# Altium PCB 11-LED.PcbDoc
Units mm, origin at the board's own origin, x right, y up, seen from the top; angles counter-clockwise.
Board outline 40 x 40 mm, 4 copper layers (Top Layer, Internal Plane 1, Internal Plane 2, Bottom Layer), stack 0.462 mm thick; 26 components, 21 nets, 68 pads, 16 vias.
Unrouted connection lines stored in the file: 38.
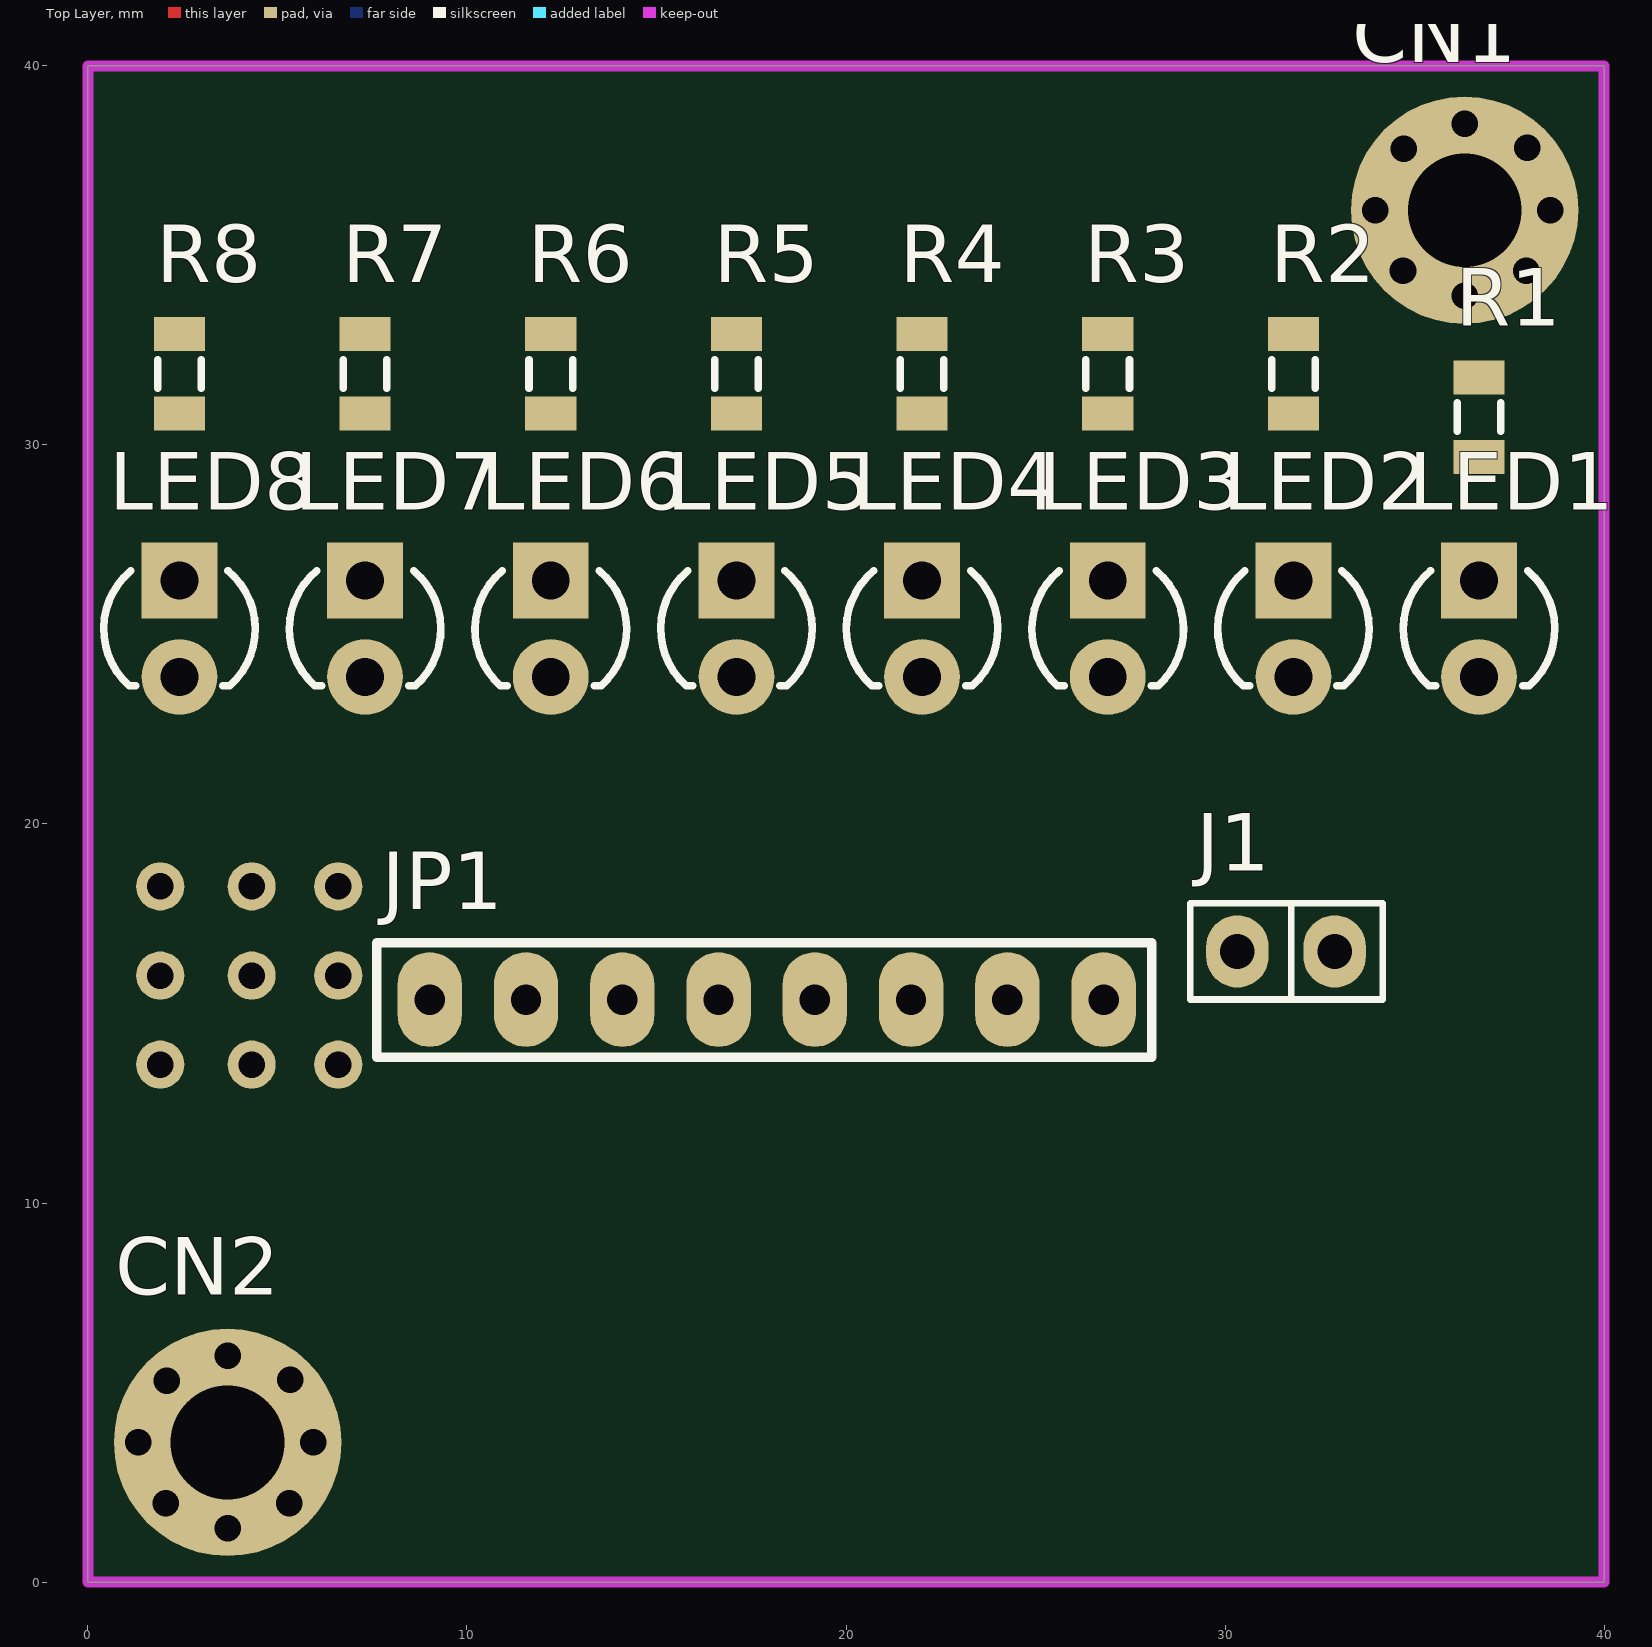
[diagram p0: Top Layer view]
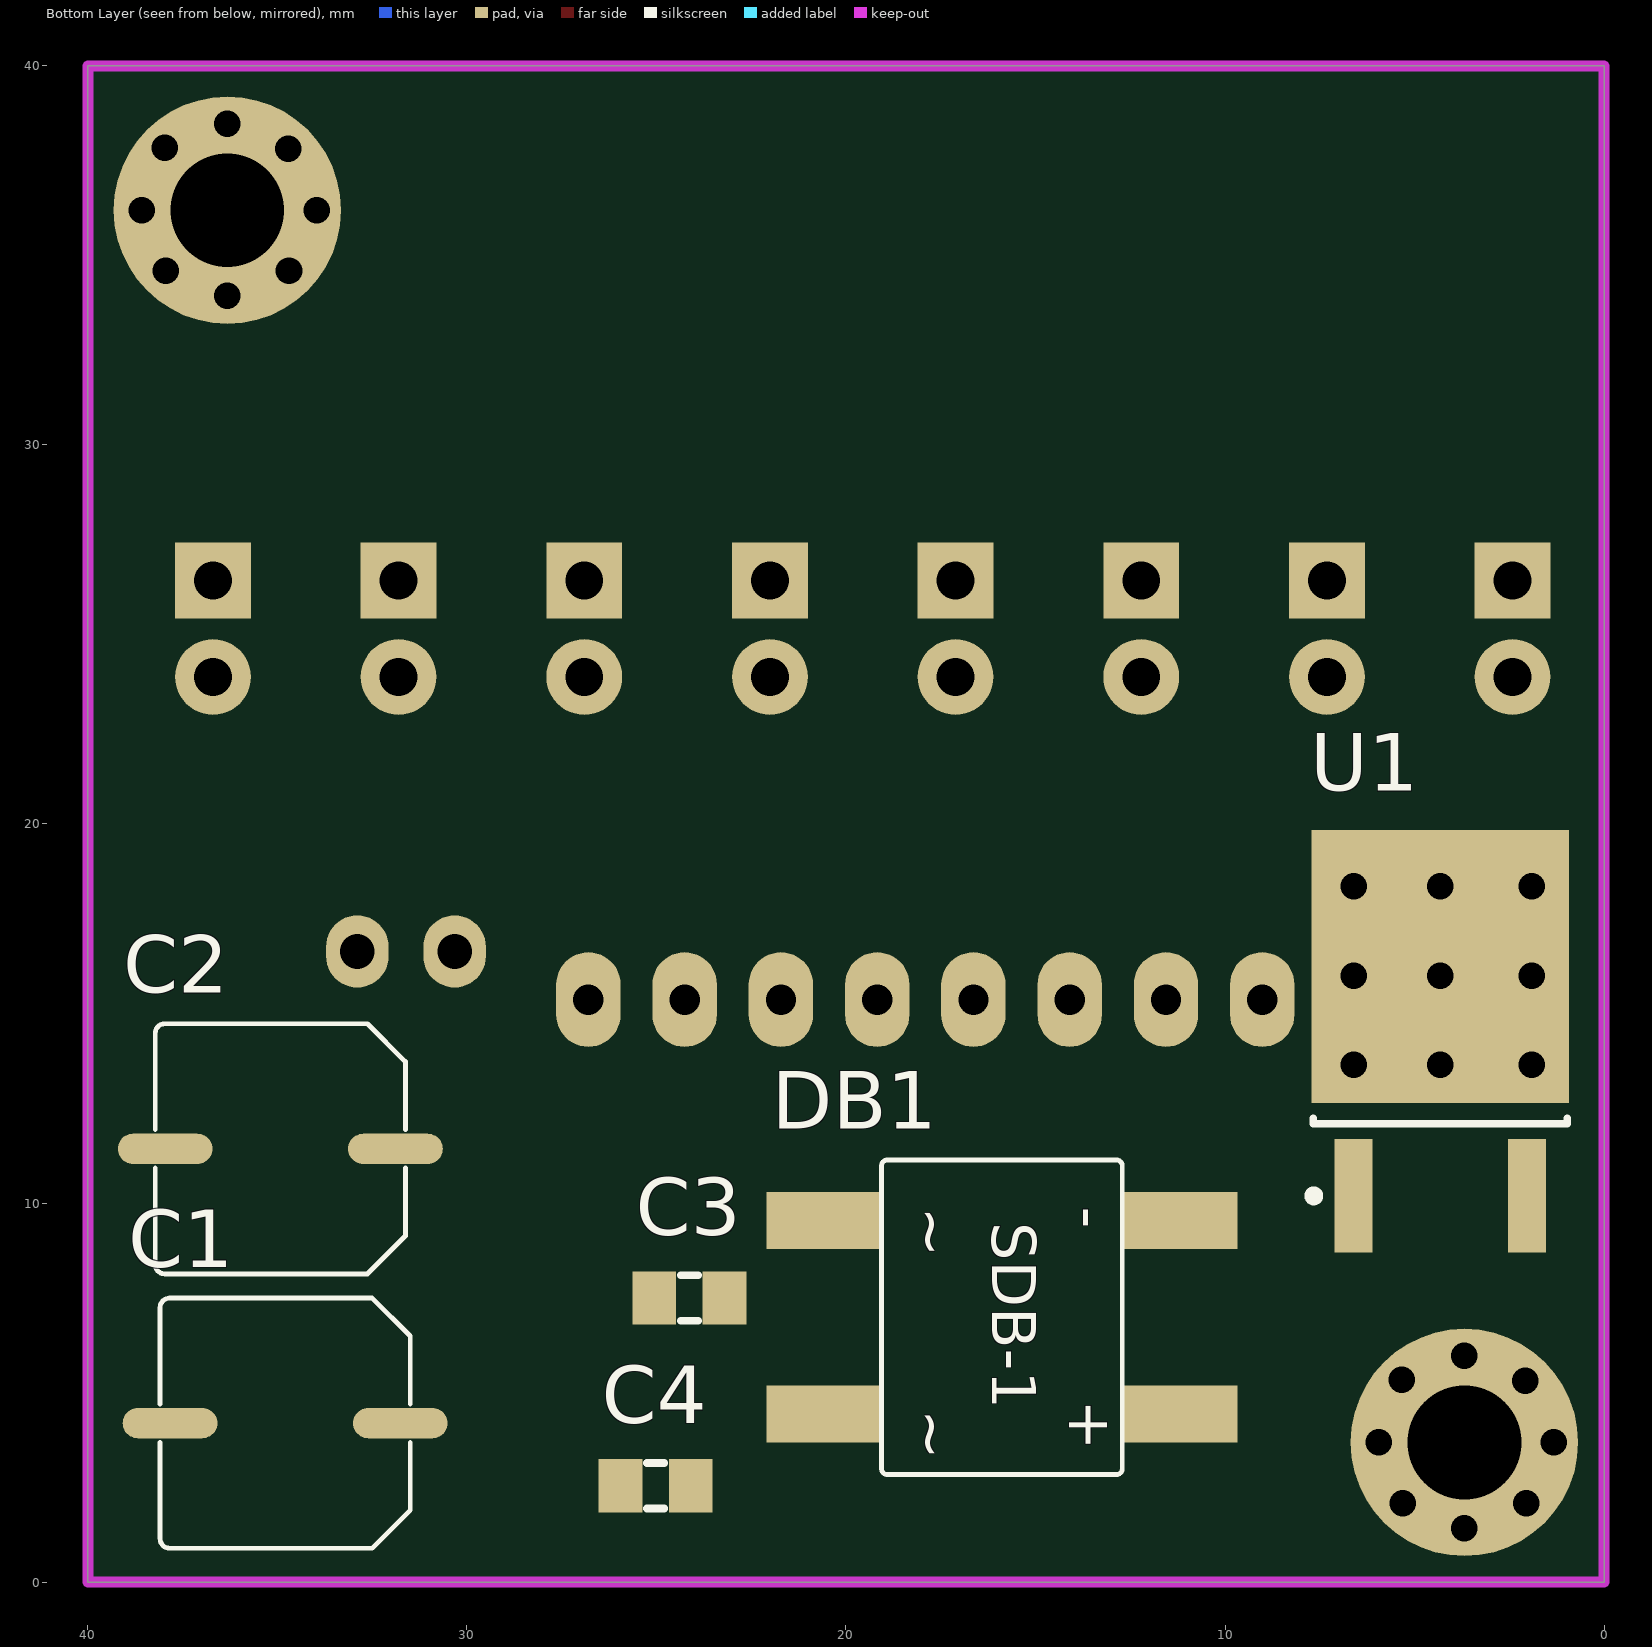
[diagram p1: Bottom Layer view, seen from below]
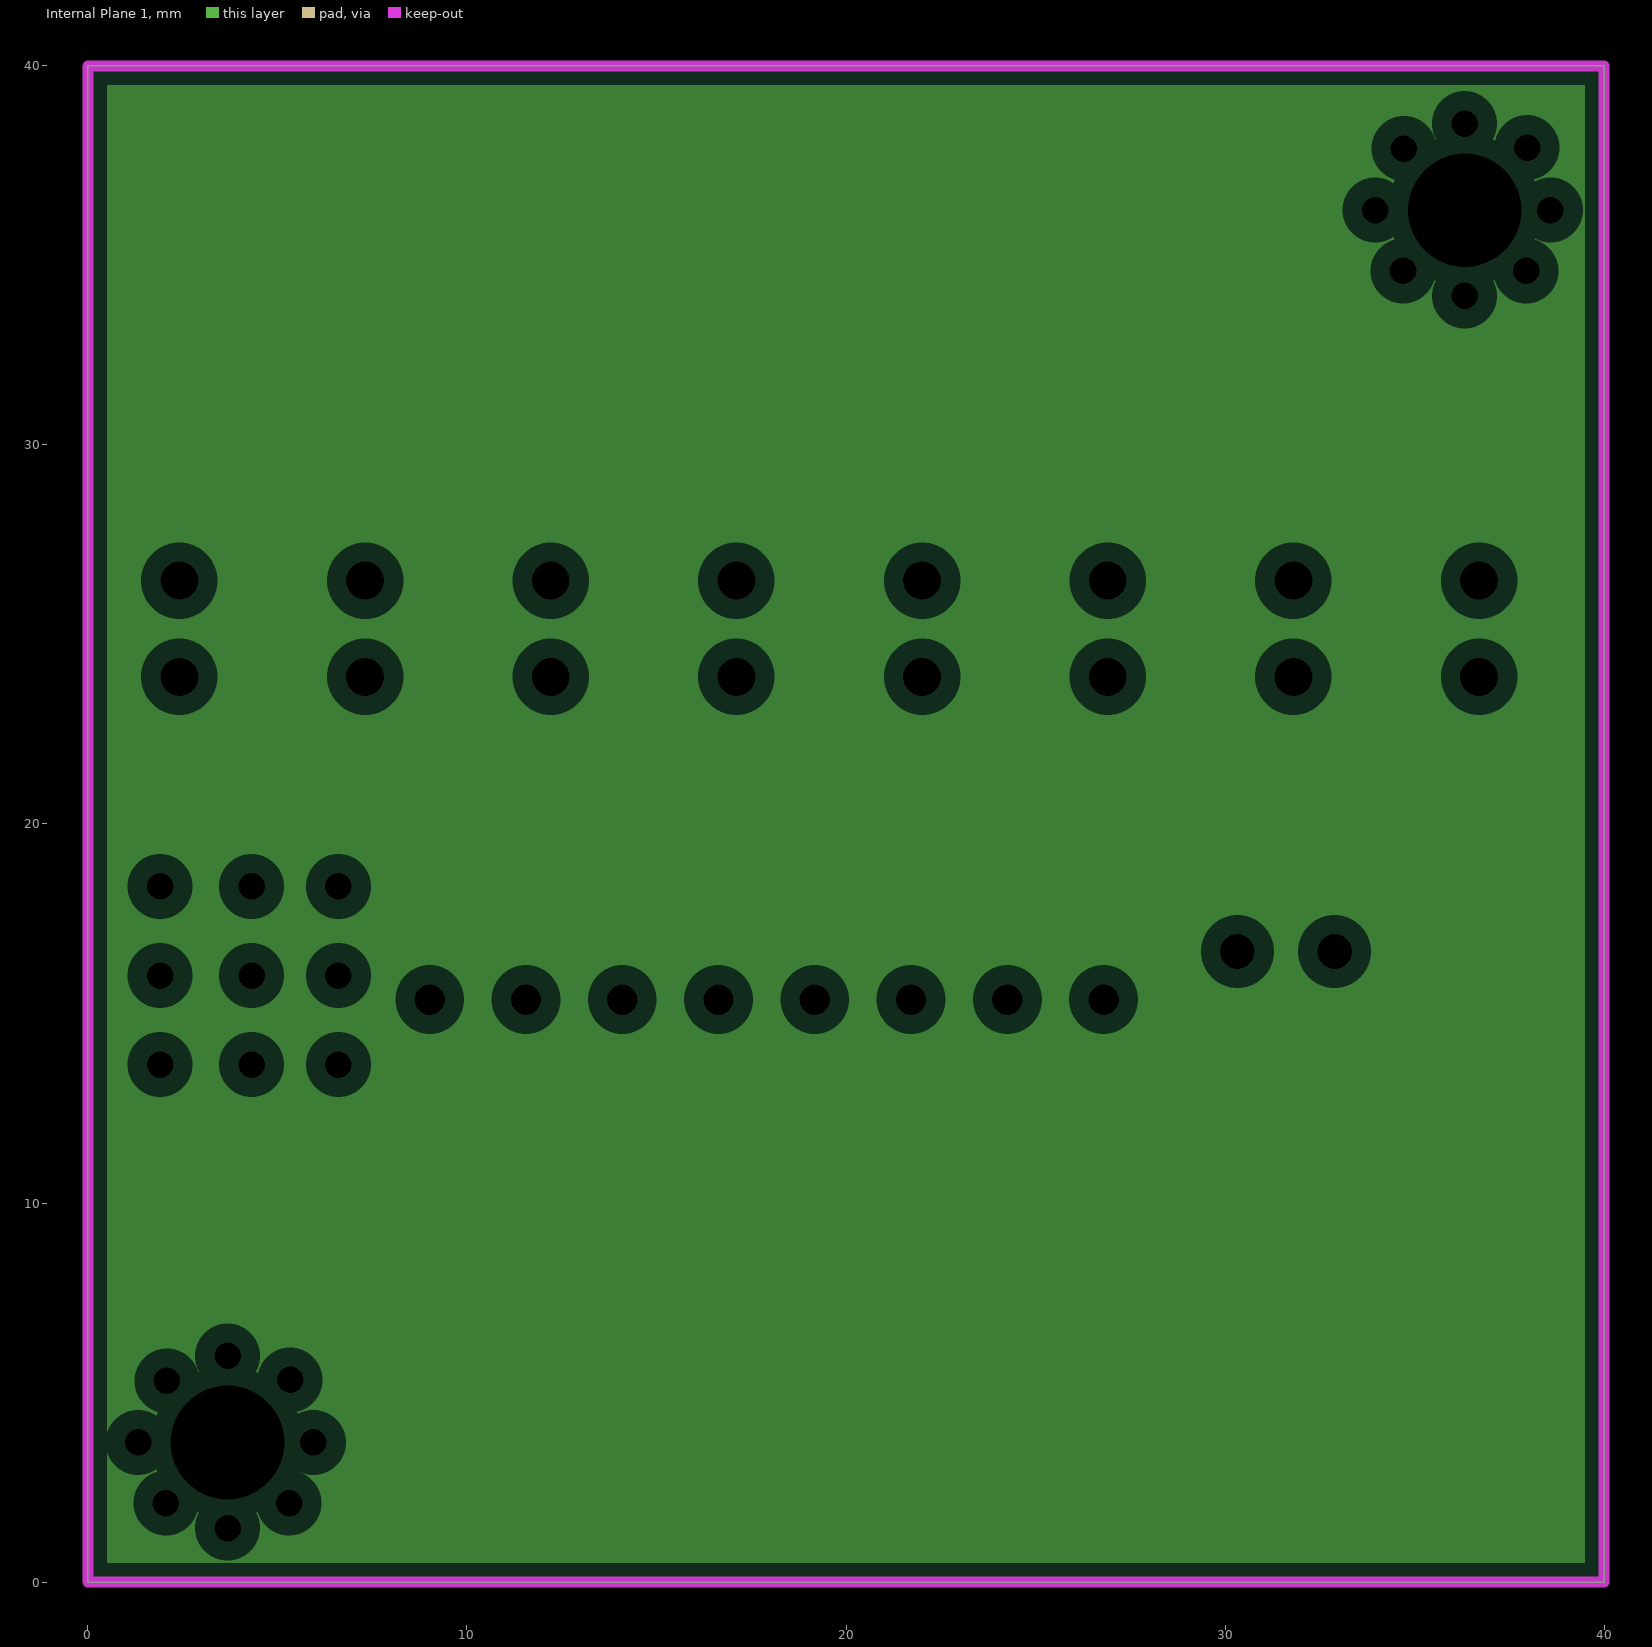
[diagram p2: Internal Plane 1, clearances drawn from the general rule]
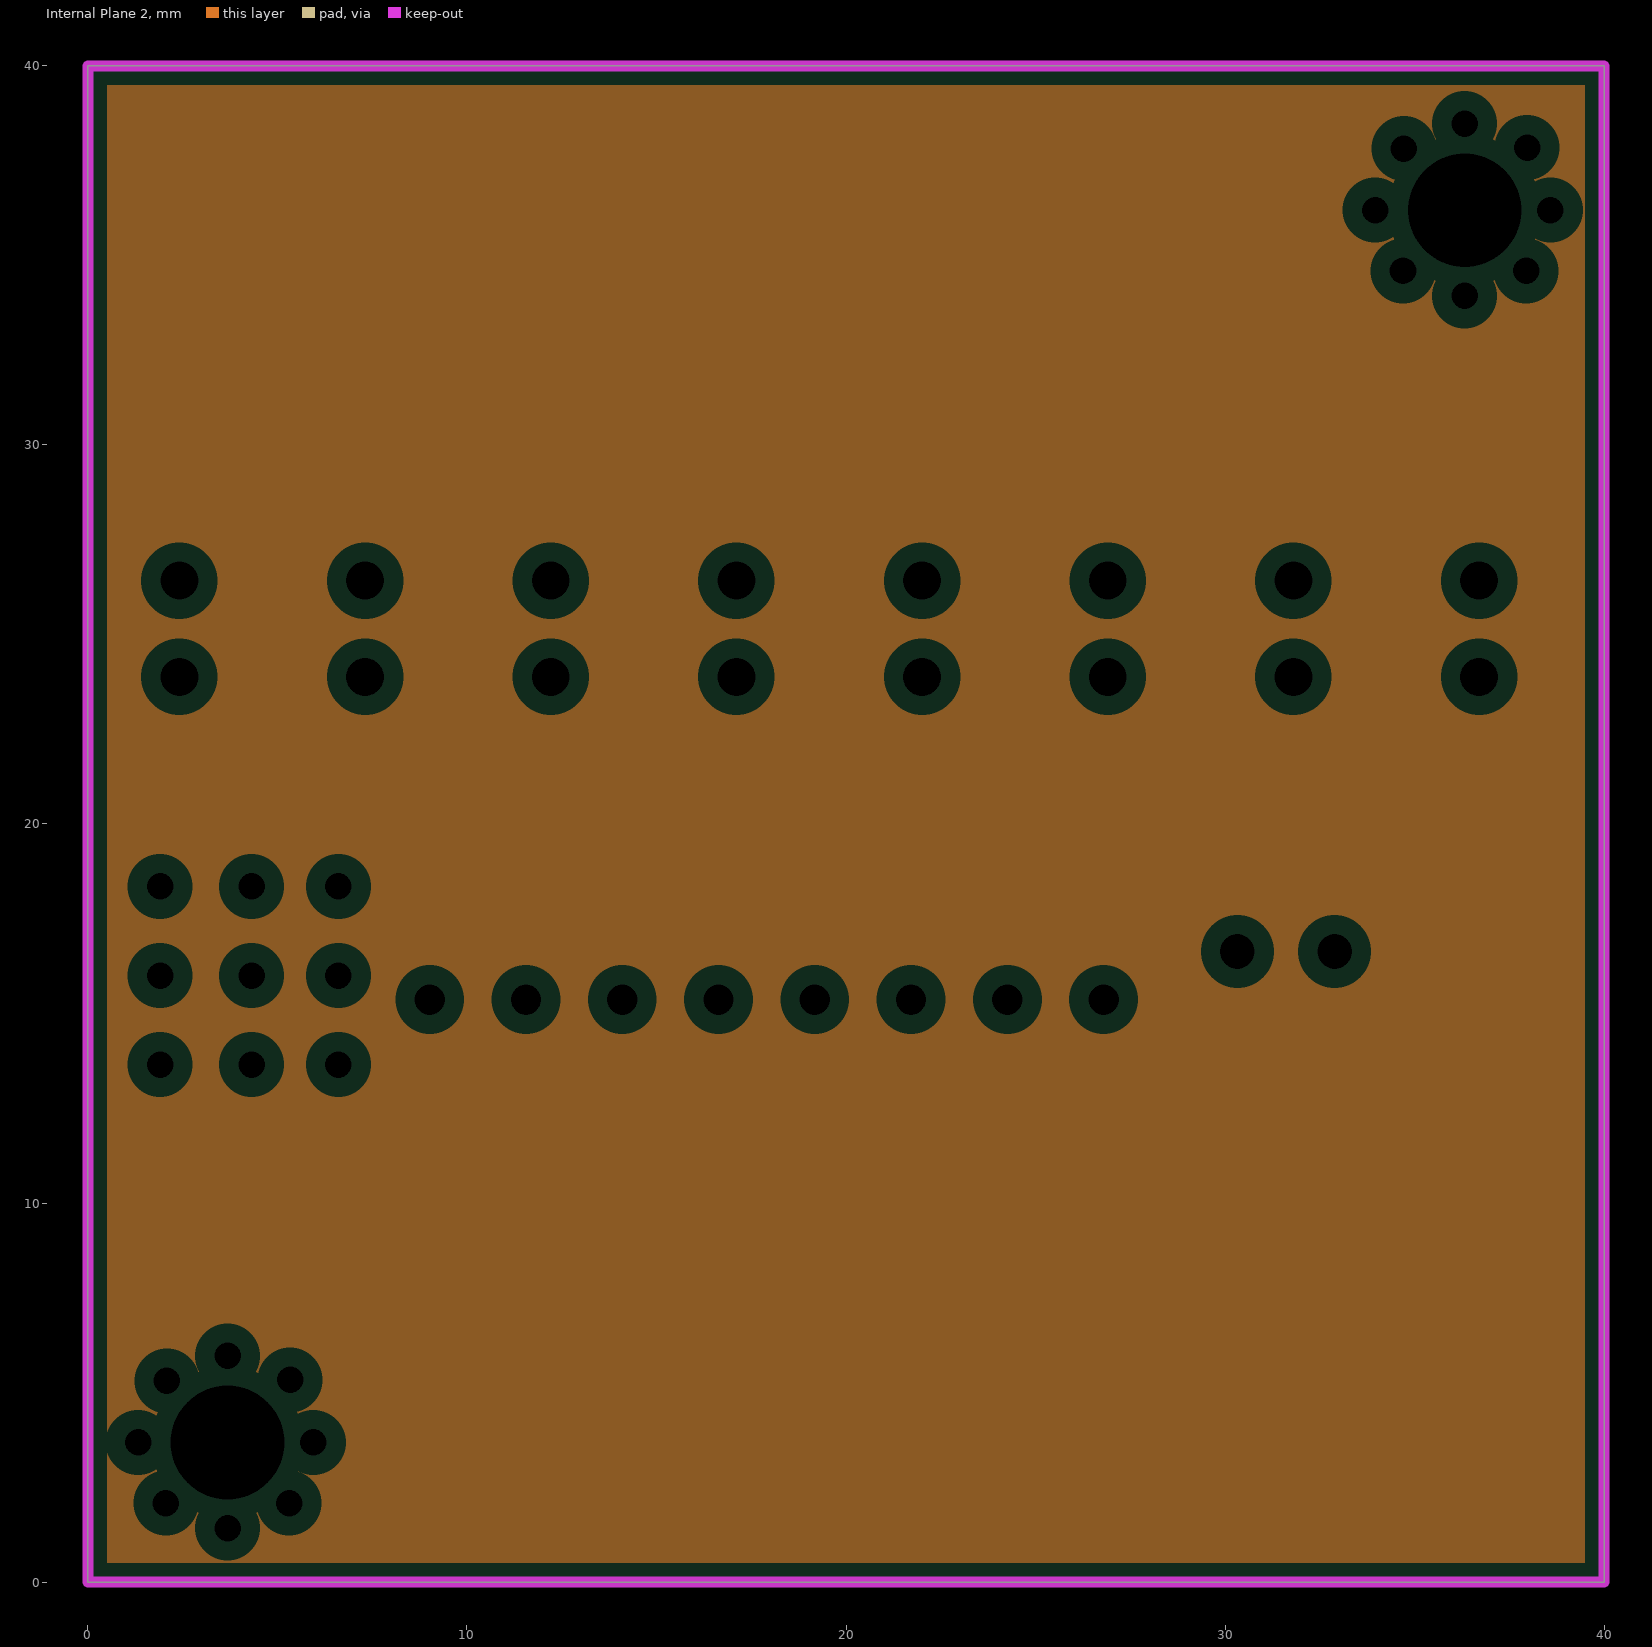
[diagram p3: Internal Plane 2, clearances drawn from the general rule]

## Layer stack, top to bottom
Top Solder: solder mask 0.0102, Solder Resist, Dk 3.5
Top Layer: signal copper 0.0356
Internal Plane 1: plane copper 0.0356
Internal Plane 2: plane copper 0.0356
Dielectric1: dielectric 0.32, FR-4, Dk 4.8
Bottom Layer: signal copper 0.0356
Bottom Solder: solder mask 0.0102, Solder Resist, Dk 3.5

## Board outline
0,0 40,0 40,40 0,40

## Design rules (kind name [scope] priority, off if disabled: settings)
AssemblyTestPointUsage AssemblyTestPointUsage_1 [All] p2:
AssemblyTestpoint AssemblyTestpoint_1 [All] p2: testpointundercomponent=TRUE minsize=1.016 maxsize=2.54 preferedsize=1.524 minholesize=0 maxholesize=1.016 preferedholesize=0.813 testpointgrid=0.025 usegrid=TRUE gridtolerance=0 allowsidetop=TRUE allowsidebottom=TRUE
Clearance [All] p1: gap=0.2
ComponentClearance ComponentClearance_1 [All] p2: gap=0.254 collisioncheckmode=3 verticalgap=0.254 showdistances=FALSE
DiffPairsRouting DiffPairsRouting_1 [All] p2: maxlimit=0.254 minlimit=0.254 mostfreqgap=0.254 toplayer_minwidth=0.381 toplayer_maxwidth=0.381 toplayer_prefwidth=0.381 bottomlayer_minwidth=0.381 bottomlayer_maxwidth=0.381 bottomlayer_prefwidth=0.381 maxuncoupledlength=12.7
FabricationTestPointUsage TestPointUsage [All] p2: valid=0 allowmultiple=FALSE
FabricationTestpoint Testpoint [All] p2: side=3 testpointundercomponent=TRUE minsize=1.016 maxsize=2.54 preferedsize=1.524 minholesize=0 maxholesize=1.016 preferedholesize=0.813 testpointgrid=0.025 allowsidetop=TRUE allowsidebottom=TRUE usegrid=TRUE gridtolerance=0
FanoutControl Fanout_LCC [IsLCC] p1: bgadir=Out bgaviamode=Centered fanoutstyle=Auto fanoutdirection=Alternating viagrid=0.025 // Fanout_LCC (Default Rule)
FanoutControl Fanout_BGA [IsBGA] p2: bgadir=Out bgaviamode=Centered fanoutstyle=Auto fanoutdirection=Alternating viagrid=0.025 // Fanout_BGA (Default Rule)
FanoutControl Fanout_Default [All] p4: bgadir=Out bgaviamode=Centered fanoutstyle=Auto fanoutdirection=Alternating viagrid=0.025 // Fanout_Default (Default Rule)
FanoutControl Fanout_Small [(CompPinCount < 5)] p5: bgadir=Out bgaviamode=Centered fanoutstyle=Auto fanoutdirection=OutThenIn viagrid=0.025 // Fanout_Small (Default Rule)
FanoutControl Fanout_BGA_1 [IsBGA] p6: bgadir=Out bgaviamode=Centered fanoutstyle=Auto fanoutdirection=Alternating viagrid=0.025 // Fanout_BGA (Default Rule)
FanoutControl Fanout_LCC_1 [IsLCC] p7: bgadir=Out bgaviamode=Centered fanoutstyle=Auto fanoutdirection=Alternating viagrid=0.025 // Fanout_LCC (Default Rule)
FanoutControl Fanout_SOIC_1 [IsSOIC] p8: bgadir=Out bgaviamode=Centered fanoutstyle=Auto fanoutdirection=Alternating viagrid=0.025 // Fanout_SOIC (Default Rule)
FanoutControl Fanout_Small_1 [(CompPinCount < 5)] p9: bgadir=Out bgaviamode=Centered fanoutstyle=Auto fanoutdirection=OutThenIn viagrid=0.025 // Fanout_Small (Default Rule)
FanoutControl Fanout_Default_1 [All] p10: bgadir=Out bgaviamode=Centered fanoutstyle=Auto fanoutdirection=Alternating viagrid=0.025 // Fanout_Default (Default Rule)
Height Height_1 [All] p2: minheight=0 maxheight=25.4 prefheight=12.7
HoleSize HoleSize_1 [All] p2: absolutevalues=TRUE maxlimit=2.54 minlimit=0.025 maxpercent=80.000 minpercent=20.000
HoleToHoleClearance HoleToHoleClearance_1 [All] p2: gap=0.254 allowstackedmicrovias=TRUE
LayerPairs LayerPairs_1 [All] p2: enforce=TRUE
MinimumSolderMaskSliver MinimumSolderMaskSliver_1 [All] p2: minsoldermaskwidth=0.254
NetAntennae NetAntennae_1 [All] p2: netantennaetolerance=0
PasteMaskExpansion PasteMaskExpansion_1 [All] p2: expansion=0
PlaneClearance [All] p1: clearance=0.508
PlaneClearance PlaneClearance_1 [All] p2: clearance=0.508
PlaneConnect [All] p1: planeconnectstyle=Relief reliefexpansion=0.508 reliefentries=4 reliefconductorwidth=0.254 reliefairgap=0.254
PolygonConnect [All] p1: connectstyle=Relief reliefconductorwidth=0.254 reliefentries=4 polygonreliefangle="90 Angle" airgapwidth=0.254
PolygonConnect PolygonConnect_1 [All] p2: connectstyle=Relief reliefconductorwidth=0.254 reliefentries=4 polygonreliefangle="90 Angle" airgapwidth=0.254
RoutingPriority RoutingPriority_1 [All] p2: routingpriority=0
RoutingTopology RoutingTopology_1 [All] p2: topology=Shortest
RoutingVias [All] p1: holewidth=0.6 width=1 viastyle="Through Hole" minholewidth=0.711 minwidth=1.27 maxholewidth=0.711 maxwidth=1.27
ShortCircuit ShortCircuit_1 [All] p2: allowed=FALSE
SilkToBoardRegionClearance SilkToBoardRegionClearance_1 [All] p2:
SilkToSilkClearance SilkToSilkClearance_1 [All] p2: silktosilkclearance=0.254
SilkToSolderMaskClearance SilkscreenOverComponentPads [IsPad] p2: minsilkscreentomaskgap=0.254 clearancetoexposedcopper=TRUE
SolderMaskExpansion [All] p1: expansion=0.102
SolderMaskExpansion SolderMaskExpansion_1 [All] p2: expansion=0.102
UnRoutedNet UnRoutedNet_1 [All] p2:
UnpouredPolygon UnpouredPolygon_1 [All] p2:
Width [All] p1: maxlimit=0.2 minlimit=0.2 preferedwidth=0.2
24 further rules are at their usual default settings.

## Components (designator, comment, footprint, x,y, rotation, side; value= is the part's Value field where it differs from the comment)
C1 "470uF" C-ALU-D6.5 34.798,4.191 r270 bottom
C2 "470uF" C-ALU-D6.5 34.925,11.43 r270 bottom
C3 "104" C-0805 24.13,7.493 r180 bottom
C4 "104" C-0805 25.025,2.54 r180 bottom
CN1 "VIN1" M3 36.322,36.195 r0 top
CN2 "VIN2" M3 3.683,3.683 r0 top
DB1 "Diode Brideg" D-DB-1A-SMD 15.886,6.985 r270 bottom
J1 "Jumper 2" JP2 32.893,16.637 r180 top
JP1 "JP8 PIN" JP8-2.54 9.017,15.367 r0 top
LED1 "LED" LED-D3 36.703,25.146 r270 top
LED2 "LED" LED-D3 31.804,25.146 r270 top
LED3 "LED" LED-D3 26.906,25.146 r270 top
LED4 "LED" LED-D3 22.007,25.146 r270 top
LED5 "LED" LED-D3 17.109,25.146 r270 top
LED6 "LED" LED-D3 12.21,25.146 r270 top
LED7 "LED" LED-D3 7.312,25.146 r270 top
LED8 "LED" LED-D3 2.413,25.146 r270 top
R1 "100R" R-0805 36.703,30.734 r90 top
R2 "100R" R-0805 31.804,31.877 r90 top
R3 "100R" R-0805 26.906,31.877 r90 top
R4 "100R" R-0805 22.007,31.877 r90 top
R5 "100R" R-0805 17.109,31.877 r90 top
R6 "100R" R-0805 12.21,31.877 r90 top
R7 "100R" R-0805 7.312,31.877 r90 top
R8 "100R" R-0805 2.413,31.877 r90 top
U1 "ASM1117" TO-252 4.318,14.287 r90 bottom

## Footprints (in the part's own frame and the unit in brackets; to place one, negate y for a bottom-side part, rotate by r counter-clockwise, add the part's x,y. Pads: shape width x height; smd on the part's side, far side on the other; paste and mask are expansions set on the pad)
C-0805 [mm] "Chip Capacitor, 2-Leads, Body 2.0x1.3mm, IPC Medium Density"
  rect 1.15x1.4 smd: 1(-0.925,0) 2(0.925,0)
  silkscreen extent -0.22,-0.6 0.23,0.6, body extent -1,-0.63 1,0.62, height 0.5
C-ALU-D6.5 [mm] "6.3x5.4mm"
  oval 0.8x2.5 smd: 1(0,3.038) 2(0,-3.038)
  silkscreen extent -3.3,-3.3 3.3,3.3, body extent -3.3,-3.8 3.3,3.8, height 6.25
D-DB-1A-SMD [mm] "DB106S"
  rect 1.5x3 smd: 1(-2.55,-4.713) 2(2.55,-4.713) 3(2.55,4.713) 4(-2.55,4.713)
  silkscreen extent -4.15,-3.18 4.15,3.18, body extent -4.15,-4.95 4.15,4.95, height 3.35
JP2 [mil]
  oval 65x75 hole 36: 1(0,0) 2(101,0)
  silkscreen extent -50,-50 150,50, body extent -48,-50 148,48, height 323
JP8-2.54 [mm]
  oval 1.7x2.5 hole 0.8: 1(0,0) 2(2.54,0) 3(5.08,0) 4(7.62,0) 5(10.16,0) 6(12.7,0) 7(15.24,0) 8(17.78,0)
  silkscreen extent -1.4,-1.52 19.05,1.5, body extent -1.27,-1.27 19.05,1.27, height 9.5
LED-D3 [mm] "D trong = 3mm, D ngoai = 4mm"
  rect 2x2 hole 1: 1(-1.275,0)
  round 2 hole 1: 2(1.265,0)
  silkscreen extent -1.54,-2 1.5,2, body extent -2.05,-2 1.62,2, height 9.1
M3 [mm]
  round 6 hole 3: 1(0,0)
R-0805 [mm] "Chip Resistor, 2-Leads, Body 2.0x1.3mm, IPC Medium Density"
  rect 0.9x1.35 smd: 1(-1.05,0) 2(1.05,0)
  silkscreen extent -0.38,-0.58 0.38,0.58, body extent -1,-0.63 1,0.63, height 0.5
TO-252 [mm] "AMS1117"
  rect 3x1 smd: 1(-4.1,2.29) 3(-4.1,-2.29)
  round 1.27 hole 0.7: 2(-0.635,-2.413) 2(-0.635,0) 2(-0.635,2.286) 2(1.714,0) 2(1.714,2.286) 2(1.715,-2.413) 2(4.064,-2.413) 2(4.064,0) 2(4.064,2.286)
  rect 7.2x6.8 smd: 2(1.95,0)
  silkscreen extent -4.22,-3.35 -2.05,3.47, body extent -4.55,-3.38 5.36,3.37, height 2.39

## Part data
C1 C2: library part CP1, "Cap P  0,1uF < 22uF , 16 - 50V"
C3 C4: library part CN
CN1 CN2: library part COCDONGM3
DB1: library part DB, "Convert AC to DC voltage, 4 pin"
J1: library part "JP 2"
JP1: library part JP8
LED1 LED2 LED3 LED4 LED5 LED6 LED7 LED8: "LED Single colour Green and Red"
R1 R2 R3 R4 R5 R6 R7 R8: library part R, "Resistor 1/4W"

## Via types
v1: diameter 1, hole 0.7, Top Layer to Bottom Layer, 16 vias

## Nets (pads, with @x,y where several pads share a name; then routed paths per layer and width w, separated by ;. In a path a pad name is that pad's centre, name@x,y a point inside that pad or via, vN(x,y) a via of type N, cw(c..) or ccw(c..) an arc to the next point about the centre after c; other vN are vias at no path point)
+5V: C2.1 C4.2 J1.2 R1.2 R2.2 R3.2 R4.2 R5.2 R6.2 R7.2 R8.2 U1.2
+12V: C1.1 C3.2 DB1.3 U1.3
GND: C1.2 C2.2 C3.1 C4.1 DB1.4 J1.1 U1.1
LED1: JP1.8 LED1.2
LED2: JP1.7 LED2.2
LED3: JP1.6 LED3.2
LED4: JP1.5 LED4.2
LED5: JP1.4 LED5.2
LED6: JP1.3 LED6.2
LED7: JP1.2 LED7.2
LED8: JP1.1 LED8.2
NetCN1_1: CN1.1 DB1.2
  other v1: 36.322,33.934 34.696,34.595 37.948,34.595 33.96,36.195 38.583,36.195 34.722,37.821 37.973,37.846 36.322,38.481
NetCN2_1: CN2.1 DB1.1
  other v1: 3.683,1.422 2.057,2.083 5.309,2.083 1.321,3.683 5.944,3.683 2.083,5.309 5.334,5.334 3.683,5.969
NetLED1_1: LED1.1 R1.1
NetLED2_1: LED2.1 R2.1
NetLED3_1: LED3.1 R3.1
NetLED4_1: LED4.1 R4.1
NetLED5_1: LED5.1 R5.1
NetLED6_1: LED6.1 R6.1
NetLED7_1: LED7.1 R7.1
NetLED8_1: LED8.1 R8.1

## Keep-outs
Keep-Out Layer:
  the board outline again, w0.3

## Text inside footprints (layer, text, board x,y; h text height)
DB1: Bottom Overlay "~        ~" at 18.68,9.906 h2 r90; Bottom Overlay "-         +" at 14.489,9.906 h2 r90; Bottom Overlay "SDB-1" at 16.526,9.493 h2 r90